# EAGLE board Seeeduino ADK 0.9b final (EAGLE 5.10)
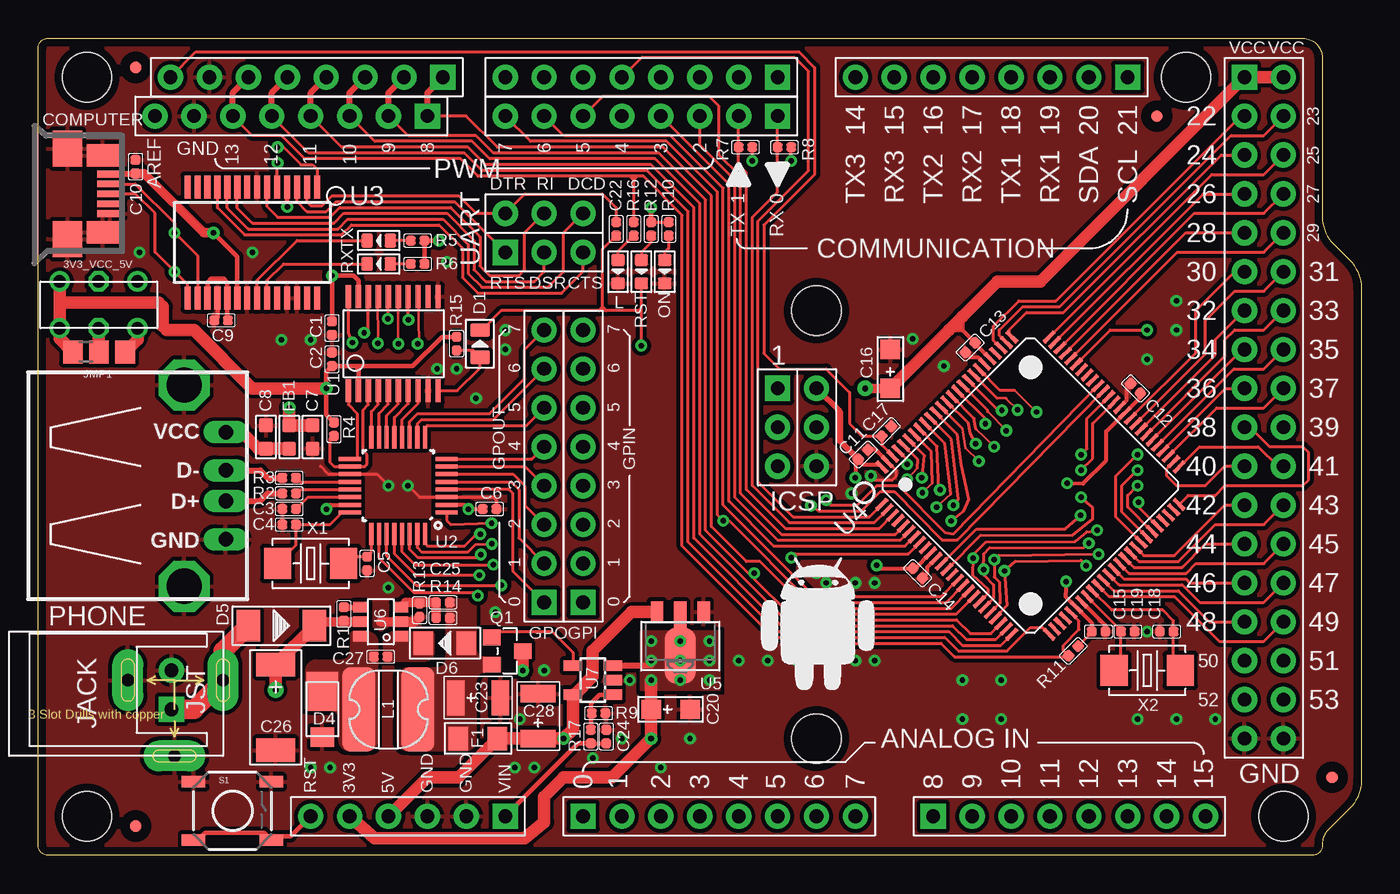
[diagram p0: board, top side]
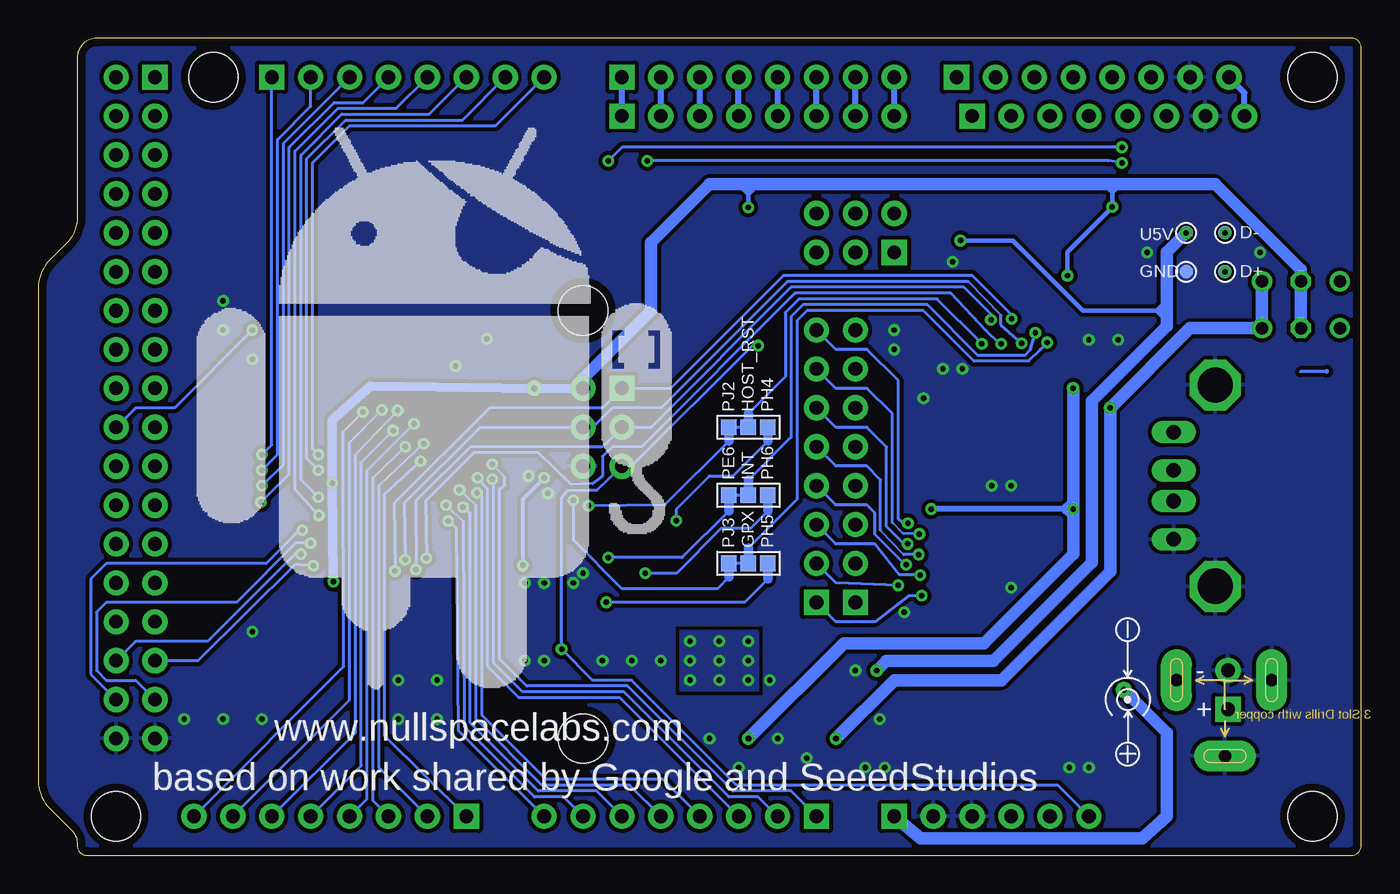
[diagram p1: board, bottom side, seen from below]

Size 86.36 x 53.34 mm. Coordinates in mm from the lower left corner, seen from the top.
Outline: 83.82,0.64 arc-90 83.19,0 0.64,0 arc-90 0,0.64 0,52.7 arc-90 0.64,53.34 82.55,53.34 arc-90 83.82,52.07 83.82,41.69 arc45 84.56,39.9 85.62,38.84 arc-45 86.36,37.05 86.36,4.86 arc-45 85.62,3.07 84.19,1.64 arc45 83.82,0.74 83.82,0.64
Copper layers (1*16): Top 0.0356mm / dielectric 1.5011mm / Bottom 0.0356mm
Design rules "SilverCircuits *": minimum track width 8mil, minimum drill 14mil, track to track 7mil, track to pad 7mil, pad to pad 7mil, via to via 7mil, smd to smd 0mil, copper to edge 20mil, drill to drill 8mil, minimum pad ring 10mil, minimum via ring 8mil, stop-mask expansion 4mil, vias tented up to drill 0mil, thermal gap 10mil
Net classes: 0 default: width 0.152 mm, drill 0.305 mm, clearance 0.152 mm
Holes 3.2 mm at 74.93,50.8 81.28,2.54 50.8,35.56 3.17,50.8 3.17,2.54 50.8,7.62

## Footprints (pad centres in the part's own frame; a part is rotated, then mirrored left to right if it is on the bottom)
2.54SW-2CH = drill 0.813 pad 1.27 round: CH1A -1.524,2.54; CH1B -1.524,-2.54; CH2A 1.524,2.54; CH2B 1.524,-2.54 | drill 0.813 pad 1.27 octagon: COM1 -1.524,0; COM2 1.524,0
0402 = smd 0.635 x 0.635: 1 -0.445,0; 2 0.445,0
0603 = smd 0.889 x 0.889: 1 -0.762,0; 2 0.762,0
AVX-A = smd 1.27 x 1.27: + -1.27,0; - 1.27,0
AVX-B = smd 1.143 x 2.286: + -1.46,0; - 1.46,0
AVX-C = smd 1.524 x 2.54: + -2.794,0; - 2.794,0
MOLEX-47364-0001 = smd 1.7 x 0.45: 1 2.8,1.3; 2 2.8,0.65; 3 2.8,0; 4 2.8,-0.65; 5 2.8,-1.3 | smd 1.9 x 2.375: GND1 0,2.95; GND4 0,-2.95 | smd 2.1 x 1.475: GND2 2.3,2.5; GND3 2.3,-2.5
D0805 = smd 0.889 x 1.27: + -0.889,0; - 0.889,0
DO-220AA = smd 1.27 x 1.524: + 1.811,0 | smd 2.54 x 2.032: - -1.176,0
D2010 = smd 1.524 x 2.032: + -2.159,0; - 2.159,0
D1206 = smd 1.27 x 1.524: + -1.397,0; - 1.397,0
TP_3535 = smd 0.889 x 0.889: T 0,0
1206 = smd 1.27 x 1.524: 1 -1.27,0; 2 1.27,0
CK_1X8 = drill 0.889 pad 1.651 square: 1 0,8.89 | drill 0.889 pad 1.651 round: 2 0,6.35; 3 0,3.81; 4 0,1.27; 5 0,-1.27; 6 0,-3.81; 7 0,-6.35; 8 0,-8.89
JUMPER = smd 1.016 x 1.016: 00 -1.27,0; 11 1.27,0; MM 0,0
CK_2X3 = drill 0.889 pad 1.651 square: 1 -1.27,2.54 | drill 0.889 pad 1.651 round: 2 -1.27,0; 3 -1.27,-2.54; 4 1.27,-2.54; 5 1.27,0; 6 1.27,2.54
2.54_6P = drill 0.889 pad 1.651 square: 1 0,6.35 | drill 0.889 pad 1.651 round: 2 0,3.81; 3 0,1.27; 4 0,-1.27; 5 0,-3.81; 6 0,-6.35
2.54-2X18P = drill 0.889 pad 1.651 square: 1 -1.27,21.59 | drill 0.889 pad 1.651 round: 2 -1.27,19.05; 3 -1.27,16.51; 4 -1.27,13.97; 5 -1.27,11.43; 6 -1.27,8.89; 7 -1.27,6.35; 8 -1.27,3.81; 9 -1.27,1.27; 10 -1.27,-1.27; 11 -1.27,-3.81; 12 -1.27,-6.35; 13 -1.27,-8.89; 14 -1.27,-11.43; 15 -1.27,-13.97; 16 -1.27,-16.51; 17 -1.27,-19.05; 18 -1.27,-21.59; 19 1.27,-21.59; 20 1.27,-19.05; 21 1.27,-16.51; 22 1.27,-13.97; 23 1.27,-11.43; 24 1.27,-8.89; 25 1.27,-6.35; 26 1.27,-3.81; 27 1.27,-1.27; 28 1.27,1.27; 29 1.27,3.81; 30 1.27,6.35; 31 1.27,8.89; 32 1.27,11.43; 33 1.27,13.97; 34 1.27,16.51; 35 1.27,19.05; 36 1.27,21.59
3.5MM_JACK = drill 0.813 pad 2.032 long: + 3.175,0; -1 -3.048,0; -2 0,-4.953
B0R-JMP = smd 1.5 x 1.3: 1 0,1.7; 2 0,0; 3 0,-1.7
PWR_JST = drill 0.889 pad 1.651 square: + 2.286,-1.27 | drill 0.889 pad 1.651 round: - 2.286,1.27
D0603 = smd 0.762 x 0.889: + -0.762,0; - 0.762,0
2281 = smd 2.15 x 5.5: P$1 -1.925,0; P$2 1.925,0
MARK_30 = smd 0.762 x 0.762: MARK 0,0
PN87520 = drill 0.95 long: 1 -3.5,2.71; 2 -1,2.71; 3 1,2.71; 4 3.5,2.71 | drill 2.3 octagon: SG1 -6.57,0; SG2 6.57,0
SOT23_ = smd 1.016 x 1.143: 1 -0.889,-1.016; 2 0.889,-1.016; 3 0,1.016
TACTILE_SWITCH_SMD = smd 1.524 x 0.762: 1 -2.54,1.905; 2 2.54,1.905; 3 -2.54,-1.905; 4 2.54,-1.905
TSSOP20 = smd 0.35 x 1.5: 1 -3.25,-3.065; 2 -2.6,-3.065; 3 -1.95,-3.065; 4 -1.3,-3.065; 5 -0.65,-3.065; 6 0,-3.065; 7 0.65,-3.065; 8 1.3,-3.065; 9 1.95,-3.065; 10 2.6,-3.065; 11 2.6,3.065; 12 1.95,3.065; 13 1.3,3.065; 14 0.65,3.065; 15 0,3.065; 16 -0.65,3.065; 17 -1.3,3.065; 18 -1.95,3.065; 19 -2.6,3.065; 20 -3.25,3.065
TQFP32-05 = smd 0.27 x 1.45: 1 -1.75,-3.16; 2 -1.25,-3.16; 3 -0.75,-3.16; 4 -0.25,-3.16; 5 0.25,-3.16; 6 0.75,-3.16; 7 1.25,-3.16; 8 1.75,-3.16; 17 1.75,3.16; 18 1.25,3.16; 19 0.75,3.16; 20 0.25,3.16; 21 -0.25,3.16; 22 -0.75,3.16; 23 -1.25,3.16; 24 -1.75,3.16 | smd 1.45 x 0.27: 9 3.16,-1.75; 10 3.16,-1.25; 11 3.16,-0.75; 12 3.16,-0.25; 13 3.16,0.25; 14 3.16,0.75; 15 3.16,1.25; 16 3.16,1.75; 25 -3.16,1.75; 26 -3.16,1.25; 27 -3.16,0.75; 28 -3.16,0.25; 29 -3.16,-0.25; 30 -3.16,-0.75; 31 -3.16,-1.25; 32 -3.16,-1.75
SSOP28 = smd 0.4 x 1.5: 1 -4.225,-3.625; 2 -3.575,-3.625; 3 -2.925,-3.625; 4 -2.275,-3.625; 5 -1.625,-3.625; 6 -0.975,-3.625; 7 -0.325,-3.625; 8 0.325,-3.625; 9 0.975,-3.625; 10 1.625,-3.625; 11 2.275,-3.625; 12 2.925,-3.625; 13 3.575,-3.625; 14 4.225,-3.625; 15 4.225,3.625; 16 3.575,3.625; 17 2.925,3.625; 18 2.275,3.625; 19 1.625,3.625; 20 0.975,3.625; 21 0.325,3.625; 22 -0.325,3.625; 23 -0.975,3.625; 24 -1.625,3.625; 25 -2.275,3.625; 26 -2.925,3.625; 27 -3.575,3.625; 28 -4.225,3.625
TQFP100 = smd 1 x 0.3: 1 -7.725,6; 2 -7.725,5.5; 3 -7.725,5; 4 -7.725,4.5; 5 -7.725,4; 6 -7.725,3.5; 7 -7.725,3; 8 -7.725,2.5; 9 -7.725,2; 10 -7.725,1.5; 11 -7.725,1; 12 -7.725,0.5; 13 -7.725,0; 14 -7.725,-0.5; 15 -7.725,-1; 16 -7.725,-1.5; 17 -7.725,-2; 18 -7.725,-2.5; 19 -7.725,-3; 20 -7.725,-3.5; 21 -7.725,-4; 22 -7.725,-4.5; 23 -7.725,-5; 24 -7.725,-5.5; 25 -7.725,-6; 51 7.725,-6; 52 7.725,-5.5; 53 7.725,-5; 54 7.725,-4.5; 55 7.725,-4; 56 7.725,-3.5; 57 7.725,-3; 58 7.725,-2.5; 59 7.725,-2; 60 7.725,-1.5; 61 7.725,-1; 62 7.725,-0.5; 63 7.725,0; 64 7.725,0.5; 65 7.725,1; 66 7.725,1.5; 67 7.725,2; 68 7.725,2.5; 69 7.725,3; 70 7.725,3.5; 71 7.725,4; 72 7.725,4.5; 73 7.725,5; 74 7.725,5.5; 75 7.725,6 | smd 0.3 x 1: 26 -6,-7.725; 27 -5.5,-7.725; 28 -5,-7.725; 29 -4.5,-7.725; 30 -4,-7.725; 31 -3.5,-7.725; 32 -3,-7.725; 33 -2.5,-7.725; 34 -2,-7.725; 35 -1.5,-7.725; 36 -1,-7.725; 37 -0.5,-7.725; 38 0,-7.725; 39 0.5,-7.725; 40 1,-7.725; 41 1.5,-7.725; 42 2,-7.725; 43 2.5,-7.725; 44 3,-7.725; 45 3.5,-7.725; 46 4,-7.725; 47 4.5,-7.725; 48 5,-7.725; 49 5.5,-7.725; 50 6,-7.725; 76 6,7.725; 77 5.5,7.725; 78 5,7.725; 79 4.5,7.725; 80 4,7.725; 81 3.5,7.725; 82 3,7.725; 83 2.5,7.725; 84 2,7.725; 85 1.5,7.725; 86 1,7.725; 87 0.5,7.725; 88 0,7.725; 89 -0.5,7.725; 90 -1,7.725; 91 -1.5,7.725; 92 -2,7.725; 93 -2.5,7.725; 94 -3,7.725; 95 -3.5,7.725; 96 -4,7.725; 97 -4.5,7.725; 98 -5,7.725; 99 -5.5,7.725; 100 -6,7.725
SOT89 = smd 0.8 x 1.4: 1 -1.524,-1.905; 3 1.524,-1.905 | smd 0.8 x 1.9: 2 0,-1.651 | smd 2.032 x 3.65: 4 0,0.94
TSOT6 = smd 0.69 x 1: 1 -0.95,-1.3; 2 0,-1.3; 3 0.95,-1.3; 4 0.95,1.3; 5 0,1.3; 6 -0.95,1.3
SOT23-5 = smd 0.69 x 1.2: 1 -0.95,-1.3; 2 0,-1.3; 3 0.95,-1.3; 4 0.95,1.3; 5 -0.95,1.3
5032 = smd 1.778 x 2.032: 1 -2.159,0; 2 2.159,0

## Placement (x,y rotation side)
3V3_VCC_5V  SWITCH-2CH-6P-2.54  [2.54SW-2CH]  3.94,35.94 90 top
C1  100nF  [0402]  19.18,34.42 270 top
C2  100nF  [0402]  19.18,32.38 90 top
C3  100nF  [0402]  16.38,22.61 180 top
C4  13pF  [0402]  16.38,21.59 180 top
C5  13pF  [0402]  21.46,19.05 270 top
C6  100nF  [0402]  29.46,22.61 0 top
C7  10v_1uF  [0603]  17.91,27.3 270 top
C8  10v_1uF  [0603]  14.86,27.3 90 top
C9  100nF  [0402]  11.94,34.92 0 top
C10  10nF  [0402]  6.35,44.96 270 top
C11  100nF  [0402]  53.85,26.16 225 top
C12  100nF  [0402]  71.63,30.48 315 top
C13  100nF  [0402]  60.83,33.15 45 top
C14  100nF  [0402]  57.4,18.41 135 top
C15  100nF  [0402]  69.22,14.61 180 top
C16  10v_10uF  [AVX-A]  55.63,31.75 90 top
C17  100nF  [0402]  55.37,27.69 225 top
C18  13pF  [0402]  73.66,14.61 0 top
C19  13pF  [0402]  71.12,14.61 180 top
C20  22uF_6.3v  [AVX-A]  41.27,9.53 0 top
C22  100nF  [0402]  37.72,40.89 90 top
C23  10v_47uF  [AVX-B]  28.7,10.29 0 top
C24  100nF  [0402]  37.08,7.75 270 top
C25  1nF  [0402]  26.42,16.51 0 top
C26  25v_47uF  [AVX-C]  15.49,9.65 270 top
C27  10nF  [0402]  22.35,12.95 180 top
C28  10v_47uF  [AVX-B]  32.64,9.08 90 top
COMPUTER  Micro USB ( MOLEX-47364-0001 )  [MOLEX-47364-0001]  1.91,43.18 0 top
D1  1N4448WS  [D0805]  28.83,33.4 90 top
D4  SS1P3L  [DO-220AA]  18.54,9.53 270 top
D5  1N4007  [D2010]  15.88,14.99 0 top
D6  LL4148  [D1206]  26.54,13.84 180 top
D+  DNP  [TP_3535]  8.89,38.1 0 bottom
D-  DNP  [TP_3535]  8.89,40.64 0 bottom
F1  500mA  [1206]  28.7,7.62 0 top
FB1  Ferrite Bead 120R 500mA  [0603]  16.38,27.3 90 top
GND  DNP  [TP_3535]  11.43,38.1 0 bottom
GPI  DNP  [CK_1X8]  35.56,25.4 180 top
GPO  DNP  [CK_1X8]  33.02,25.4 180 top
GPX  DNP  [JUMPER]  40.01,19.05 180 bottom
HOST_RST  DNP  [JUMPER]  40.01,27.94 180 bottom
ICSP  2.54 male 2*3p  [CK_2X3]  49.53,27.94 0 top
INT  DNP  [JUMPER]  40.01,23.5 180 bottom
INTERFACE  2.54 female 8p  [CK_1X8]  62.23,50.8 270 top
J1  2.54 female 6p  [2.54_6P]  24.13,2.54 270 top
J2  2.54 Female 2*18p  [2.54-2X18P]  80.01,29.21 0 top
J3  2.54 female 8p  [CK_1X8]  17.53,50.8 270 top
J3E  DNP  [CK_1X8]  16.51,48.26 270 top
J4  2.54 female 8p  [CK_1X8]  39.37,50.8 270 top
J4E  DNP  [CK_1X8]  39.37,48.26 270 top
J5  2.54 female 8p  [CK_1X8]  44.45,2.54 90 top
J6  2.54 female 8p  [CK_1X8]  67.31,2.54 90 top
JACK  DNP  [3.5MM_JACK]  8.89,11.43 0 top
JMP1  0R-JUMPB  [B0R-JMP]  3.96,32.87 270 top
JST  JST  [PWR_JST]  6.41,10.79 0 top
L  GREEN  [D0603]  37.85,38.1 270 top
L1  IDCP-2218-10uH  [2281]  22.86,9.53 0 top
MARK1  DNP  [MARK_30]  84.45,5.08 0 top
MARK2  DNP  [MARK_30]  73.03,48.26 0 top
MARK3  DNP  [MARK_30]  6.35,1.91 0 top
MARK4  DNP  [MARK_30]  6.35,51.44 0 top
ON  GREEN  [D0603]  40.89,38.1 270 top
PHONE  USB-A Port  [PN87520]  9.53,24.13 270 top
Q1  si2305DS  [SOT23_]  30.61,13.34 270 top
R1  100k  [0402]  19.94,15.75 90 top
R2  33R  [0402]  16.38,23.62 0 top
R3  33R  [0402]  16.38,24.64 0 top
R4  4K7  [0402]  19.3,27.81 90 top
R5  1K  [0402]  24.77,40.13 0 top
R6  1K  [0402]  24.77,38.61 0 top
R7  1k  [0402]  46.16,46.23 180 top
R8  1k  [0402]  48.7,46.23 180 top
R9  100k  [0402]  36.58,9.27 180 top
R10  1K  [0402]  41.15,40.89 90 top
R11  10k  [0402]  67.56,13.34 45 top
R12  1K  [0402]  40.01,40.89 90 top
R13  8.2k_1%  [0402]  24.89,16 90 top
R14  43k_1%  [0402]  26.42,15.49 0 top
R15  10k  [0402]  27.3,33.4 270 top
R16  1K  [0402]  38.86,40.89 90 top
R17  100k  [0402]  36.07,7.75 90 top
RST  RED  [D0603]  39.37,38.1 270 top
RX  RED  [D0603]  22.23,38.61 180 top
S1  [TACTILE_SWITCH_SMD]  12.67,2.9 0 top
TX  RED  [D0603]  22.23,40.13 180 top
U1  TXB0108PW  [TSSOP20]  23.5,33.4 0 top
U2  MAX3421EEHJ+  [TQFP32-05]  23.5,24.13 90 top
U3  FT232RL  [SSOP28]  13.97,40.01 180 top
U4  ATMEGA2560-16AU  [TQFP100]  64.77,24.13 45 top
U5  LD1117-3.3  [SOT89]  41.91,13.97 180 top
U5V  DNP  [TP_3535]  11.43,40.64 0 bottom
U6  LM2734YMK  [TSOT6]  22.35,15.24 90 top
U7  LM321MF  [SOT23-5]  36.2,11.43 90 top
U$1  [NINJA_SM]  46.25,10.44 0 top
U$2  [PIRATE]  76.23,9.8 0 bottom
UART  DNP  [CK_2X3]  33.02,40.64 90 top
X1  12.000MHz  [5032]  17.78,19.05 180 top
X2  16.000MHz  [5032]  72.39,12.06 0 top

## Library data of the parts
3V3_VCC_5V C1-C20 C22-C28 D1 D4-D6 F1 FB1 GPX HOST_RST INT L L1 MARK1-MARK4 ON Q1 R1-R17 RST RX TX X1 X2 = Discrete
COMPUTER = usb_con-update
D+ D- GND U5V = For_Test_Albert
GPI GPO ICSP INTERFACE J1-J3 J3E J4 J4E J5 J6 JACK JST UART = Connector
JMP1 = jump-0r-smd
PHONE = con-berg
S1 = SparkFun
U1 U5-U7 = IC
U2 = bibaja
U3 U4 = ICs_v54
U$1 U$2 = NSL_LOGO

## Nets
3V3: 3V3_VCC_5V.CH1A 3V3_VCC_5V.CH2A C2.1 C6.1 C20.+ J1.5 JMP1.3 R4.2 R15.1 U1.2 U2.2 U2.23 U5.2 U5.4 U7.3
5V: 3V3_VCC_5V.CH1B 3V3_VCC_5V.CH2B C7.1 C28.+ F1.2 FB1.2 J1.4 JMP1.1 U5.3 U7.5
ADC8: J6.1 U4.89
ADC9: J6.2 U4.88
ADC10: J6.3 U4.87
ADC11: J6.4 U4.86
ADC12: J6.5 U4.85
ADC13: J6.6 U4.84
ADC14: J6.7 U4.83
ADC15: J6.8 U4.82
AREF: C17.2 J3.8 J3E.8 U4.98
CTS: U3.11 UART.3
D+: COMPUTER.3 D+.T U3.15
D-: COMPUTER.2 D-.T U3.16
DCD: U3.10 UART.4
DSR: U3.9 UART.2
DTR: C22.2 U3.2 UART.6
FT_RX: R7.1 U3.5
FT_TX: R8.1 U3.1
GATE: Q1.1 U7.4
GND: C1.2 C2.2 C3.2 C4.2 C5.2 C6.2 C7.2 C8.2 C9.1 C10.1 C11.1 C12.1 C13.1 C14.1 C15.1 C16.- C17.1 C18.1 C19.1 C20.- C23.- C24.1 C26.- C28.- COMPUTER.5 COMPUTER.GND1 COMPUTER.GND2 COMPUTER.GND3 COMPUTER.GND4 D4.+ GND.T ICSP.4 J1.2 J1.3 J2.18 J2.19 J3.7 J3E.7 JACK.-1 JACK.-2 JST.- L.- ON.- PHONE.4 PHONE.SG1 PHONE.SG2 R9.1 R13.1 S1.1 S1.2 U1.9 U1.11 U2.3 U2.19 U3.7 U3.18 U3.21 U3.25 U3.26 U4.11 U4.32 U4.62 U4.81 U4.99 U5.1 U6.2 U7.2
GPX_3V3: U1.1 U2.17
IN_5V: C23.+ C25.2 D6.+ F1.1 L1.P$2 Q1.2 R14.2
INT_3V3: R4.1 U1.3 U2.18
LED_RX: RX.- U3.23
LED_TX: TX.- U3.22
MISO_3V3: U1.5 U2.15
MOSI_3V3: U1.4 U2.16
N$1: C9.2 U3.17 U3.19
N$2: C18.2 U4.34 X2.2
N$3: C19.2 U4.33 X2.1
N$5: D5.+ JACK.+ JST.+
N$6: R1.2 U6.4
N$7: C27.1 D6.- U6.1
N$8: C27.2 D4.- L1.P$1 U6.6
N$9: R9.2 R17.2 U7.1
N$10: PHONE.2 R3.1
N$11: PHONE.3 R2.1
N$12: R3.2 U2.20
N$13: R2.2 U2.21
N$14: C8.1 FB1.1 PHONE.1
N$15: C4.1 U2.24 X1.2
N$16: C5.1 U2.25 X1.1
N$17: C25.1 R13.2 R14.1 U6.3
N$18: GPI.2 U2.27
N$19: GPI.3 U2.28
N$20: GPI.4 U2.29
N$21: GPI.5 U2.30
N$22: GPI.6 U2.31
N$23: GPI.7 U2.32
N$24: GPI.8 U2.1
N$25: GPI.1 U2.26
N$26: GPO.2 U2.5
N$27: GPO.3 U2.6
N$28: GPO.4 U2.7
N$29: GPO.5 U2.8
N$30: GPO.6 U2.9
N$31: GPO.7 U2.10
N$32: GPO.8 U2.11
N$33: GPO.1 U2.4
N$34: R5.1 TX.+
N$35: R6.1 RX.+
N$36: L.+ R16.1
N$37: ON.+ R10.1
N$38: R12.1 RST.+
N$39: C3.1 U2.22
PA0/D22: J2.2 U4.78
PA1/D23: J2.35 U4.77
PA2/D24: J2.3 U4.76
PA3/D25: J2.34 U4.75
PA4/D26: J2.4 U4.74
PA5/D27: J2.33 U4.73
PA6/D28: J2.5 U4.72
PA7/D29: J2.32 U4.71
PB0/SS/D53: J2.20 U1.15 U4.19
PB1/SCK/D52: ICSP.2 J2.17 U1.14 U4.20
PB2/MOSI/D51: ICSP.5 J2.21 U1.17 U4.21
PB3/MISO/D50: ICSP.1 J2.16 U1.16 U4.22
PB4/D10: J3.3 J3E.3 U4.23
PB5/D11: J3.4 J3E.4 U4.24
PB6/D12: J3.5 J3E.5 U4.25
PB7/D13: J3.6 J3E.6 R16.2 U4.26
PC0/D37: J2.28 U4.53
PC1/D36: J2.9 U4.54
PC2/D35: J2.29 U4.55
PC3/D34: J2.8 U4.56
PC4/D33: J2.30 U4.57
PC5/D32: J2.7 U4.58
PC6/D31: J2.31 U4.59
PC7/D30: J2.6 U4.60
PD0/SCL: INTERFACE.1 U4.43
PD1/SDA: INTERFACE.2 U4.44
PD2/RX1: INTERFACE.3 U4.45
PD3/TX1: INTERFACE.4 U4.46
PD4: U4.47
PD5: U4.48
PD6: U4.49
PD7/D38: J2.10 U4.50
PE0/RX0/D0: J4.1 J4E.1 R8.2 U4.2
PE1/TX0/D1: J4.2 J4E.2 R7.2 U4.3
PE2: U4.4
PE3/D5: J4.6 J4E.6 U4.5
PE4/D2: J4.3 J4E.3 U4.6
PE5/D3: J4.4 J4E.4 U4.7
PE6: INT.11 INT.MM U1.18 U4.8
PE7: U4.9
PF0/D54: J5.1 U4.97
PF1/D55: J5.2 U4.96
PF2/D56: J5.3 U4.95
PF3/D57: J5.4 U4.94
PF4/D58: J5.5 U4.93
PF5/D59: J5.6 U4.92
PF6/D60: J5.7 U4.91
PF7/D61: J5.8 U4.90
PG0/D41: J2.26 U4.51
PG1/D40: J2.11 U4.52
PG2/D39: J2.27 U4.70
PG3: U4.28
PG4: U4.29
PG5/D4: J4.5 J4E.5 U4.1
PH0/RXD2: INTERFACE.5 U4.12
PH1/TXD2: INTERFACE.6 U4.13
PH2: U4.14
PH3/D6: J4.7 J4E.7 U4.15
PH4/D7: HOST_RST.00 J4.8 J4E.8 U4.16
PH5/D8: GPX.00 J3.1 J3E.1 U4.17
PH6/D9: INT.00 J3.2 J3E.2 U4.18
PH7: U4.27
PJ0/RXD3: INTERFACE.7 U4.63
PJ1/TXD3: INTERFACE.8 U4.64
PJ2: HOST_RST.11 HOST_RST.MM U1.13 U4.65
PJ3: GPX.11 GPX.MM U1.20 U4.66
PJ4: U4.67
PJ5: U4.68
PJ6: U4.69
PJ7: U4.79
PL0/D49: J2.22 U4.35
PL1/D48: J2.15 U4.36
PL2/D47: J2.23 U4.37
PL3/D46: J2.14 U4.38
PL4/D45: J2.24 U4.39
PL5/D44: J2.13 U4.40
PL6/D43: J2.25 U4.41
PL7/D42: J2.12 U4.42
RESET: C22.1 D1.- ICSP.3 J1.6 R11.1 RST.- S1.3 S1.4 U4.30
RI: U3.6 UART.5
RST_3V3: U1.8 U2.12
RTS: U3.3 UART.1
SCK_3V3: U1.7 U2.13
SPI_OE: D1.+ R15.2 U1.10
SS_3V3: U1.6 U2.14
USB_5V: C10.2 COMPUTER.1 Q1.3 R5.2 R6.2 U3.20 U5V.T
VCC: 3V3_VCC_5V.COM1 3V3_VCC_5V.COM2 C1.1 C11.2 C12.2 C13.2 C14.2 C15.2 C16.+ ICSP.6 J2.1 J2.36 JMP1.2 R10.2 R11.2 R12.2 U1.19 U3.4 U4.10 U4.31 U4.61 U4.80 U4.100
VIN: C24.2 C26.+ D5.- J1.1 R1.1 R17.1 U6.5

## Tracks (layer width: path | path; a pad name or v marks a point on that pad's centre or on a via)
3V3  (via drill 0.36 pad 0.64, 0.36 pad 0.81, 0.38 pad 0.81)
  Top 0.254: U2.23 19.07,22.88 v18.8,22.61 | U2.2 27.79,22.88 v28.07,22.61 C6.1
  Top 0.305: 20.89,31.75 U1.2 | 21.08,31.94 20.89,31.75 | 20.89,31.75 20.7,31.94 | 20.7,31.94 C2.1 18.8,31.56 v18.8,30.48 18.8,28.77 R4.2 | 20.7,31.94 21.08,31.94 | 21.08,31.94 24.45,31.94 26.35,33.85 R15.1
  Top 0.406: U7.3 40.01,12.38 v40.01,12.7
  Top 0.61: v41.91,13.97 U5.2
  Top 0.813: J1.5 21.97,1.12 31.75,1.12 33.02,2.16 33.02,3.81 34.29,5.08 37.47,5.08 v40.01,7.62 C20.+ v40.01,11.43 | v18.8,30.48 13.97,30.48 10.16,34.29 8.38,34.29 8.13,34.54 8.13,35.81 7.87,36.07 1.52,36.07 | 1.52,36.07 1.4,36.2 3V3_VCC_5V.CH2A | 1.52,36.07 1.4,35.94 3V3_VCC_5V.CH1A 1.4,33.73 JMP1.3
  Bottom 0.406: 19.18,22.61 v28.07,22.61
  Bottom 0.813: 18.8,22.23 18.8,19.68 24.64,13.84 33.78,13.84 v40.01,7.62 | 18.8,22.23 v18.8,22.61 18.8,22.99 | 18.8,22.99 v18.8,30.48 | 18.8,22.99 19.18,22.61 18.8,22.23
  other vias: 41.91,11.43 41.91,12.7 43.81,13.97 43.81,12.7 43.81,11.43 40.01,13.97
  pour Top (isolate 0.254, rank 2, no thermals): 44.45,14.61 44.45,10.79 39.37,10.79 39.37,14.61
  pour Bottom (isolate 0.254, rank 2, no thermals): 44.45,14.61 44.45,10.79 39.37,10.79 39.37,14.61
5V  (via drill 0.36 pad 0.81, 0.38 pad 0.81)
  Top 0.813: J1.4 25.4,5.08 27.43,5.08 F1.2 C28.+ v34.29,7.62 34.9,8.22 U7.5 34.99,10.48 36.2,11.68 36.2,13.34 38.73,15.88 U5.3 | v16.38,29.21 FB1.2 C7.1 | 3V3_VCC_5V.CH1B 6.48,33.68 JMP1.1
  Bottom 0.813: 3V3_VCC_5V.CH2B 3V3_VCC_5V.CH1B 11.18,34.42 v16.38,29.21 16.38,18.54 23.5,11.43 30.48,11.43 v34.29,7.62
ADC8  (via drill 0.36 pad 0.64)
  Top 0.178: 60.33,27.87 60.53,26.59 v61.4,25.73
  Top 0.203: 60.33,27.87 U4.89
  Bottom 0.203: J6.1 63.74,7.8 63.74,23.6 v61.4,25.73
ADC9  (via drill 0.36 pad 0.41)
  Top 0.203: U4.88 60.71,28.21 60.84,27.54 v61.2,26.87
  Bottom 0.178: 64.12,24.14 v61.2,26.87
  Bottom 0.203: J6.2 64.12,5.72 64.12,24.14
ADC10  (via drill 0.36 pad 0.64)
  Top 0.178: v62.4,26.67 61.22,27.82
  Top 0.203: U4.87 61.09,28.52 61.22,27.82
  Bottom 0.178: 64.51,24.64 v62.4,26.67
  Bottom 0.203: J6.3 64.52,3.56 64.51,24.64
ADC11  (via drill 0.36 pad 0.64)
  Top 0.203: U4.86 61.85,28.46 v61.83,28.17
  Bottom 0.178: 64.89,25.12 v61.83,28.17
  Bottom 0.203: J6.4 64.9,3.68 64.89,25.12
ADC12  (via drill 0.36 pad 0.64)
  Top 0.178: v63.19,27.73 61.98,28.96
  Top 0.203: U4.85 61.98,29.05 61.98,28.96
  Bottom 0.178: 65.28,25.65 v63.19,27.73
  Bottom 0.203: J6.5 65.28,5.84 65.28,25.65
ADC13  (via drill 0.36 pad 0.64)
  Top 0.203: U4.84 62.65,29.08 v62.9,29.04
  Bottom 0.178: 65.66,26.16 v62.9,29.04
  Bottom 0.203: J6.6 65.66,8 65.66,26.16
ADC14  (via drill 0.36 pad 0.64)
  Top 0.178: v63.94,29.07 63.17,29.83
  Top 0.203: U4.83 62.59,29.84 63.17,29.83
  Bottom 0.178: 66.05,26.96 v63.94,29.07
  Bottom 0.203: J6.7 66.04,10.16 66.05,26.96
ADC15  (via drill 0.36)
  Top 0.178: v65.17,28.94 63.74,30.35
  Top 0.203: U4.82 62.79,30.35 63.74,30.35
  Bottom 0.178: 66.46,27.64 v65.17,28.94
  Bottom 0.203: J6.8 66.42,12.32 66.46,27.64
AREF
  Top 0.203: U4.98 55.06,26.77 C17.2 53.78,27.37 52.96,28.19 52.96,30.23 51.44,31.75 48.39,31.75 47.37,32.77 47.37,41.15 50.67,44.45 50.67,51.44 49.66,52.45 10.29,52.45 J3.8
  Bottom 0.406: J3E.8 7.62,49.78 J3.8
CTS
  Top 0.203: U3.11 11.7,42.28 13.46,40.51 19.81,40.51 20.45,41.15 26.16,41.15 27.69,39.62 27.69,37.72 28.7,36.7 34.16,36.7 35.56,38.1 UART.3
D+  (via drill 0.36 pad 0.64)
  Top 0.203: U3.15 9.74,37.24 D+.T 7.62,39.37 7.62,41.91 6.35,43.18 COMPUTER.3
  other vias: 8.89,38.1
D-  (via drill 0.36 pad 0.64)
  Top 0.203: U3.16 10.39,39.13 D-.T 8.89,41.27 6.33,43.83 COMPUTER.2
  other vias: 8.89,40.64
DCD
  Top 0.203: U3.10 12.35,42.27 13.72,40.89 19.56,40.89 20.19,41.53 26.42,41.53 28.07,39.88 28.07,37.97 28.96,37.08 33.27,37.08 34.29,38.1 34.29,40.64 UART.4
DSR
  Top 0.203: U3.9 12.99,42.25 13.97,41.27 19.3,41.27 19.94,41.91 26.67,41.91 28.45,40.13 28.45,38.23 29.21,37.47 32.38,37.47 33.02,38.1 UART.2
DTR
  Top 0.203: U3.2 17.55,42.65 17.78,42.42 18.54,42.42 19.18,43.05 27.43,43.05 28.57,41.91 UART.6 31.75,43.18 36.83,43.18 37.72,42.29 C22.2
FT_RX  (via drill 0.36 pad 0.64)
  Top 0.203: U3.5 15.6,44.8 v15.62,45.21 | v46.61,45.34 R7.1
  Bottom 0.203: v15.62,45.21 16.51,45.34 v46.61,45.34
FT_TX  (via drill 0.36 pad 0.64)
  Top 0.203: U3.1 18.2,44.8 17.91,45.09 17.14,45.09 16,46.23 v15.62,46.23 | v49.15,45.34 R8.1
  Bottom 0.203: v15.62,46.23 48.26,46.23 v49.15,45.34
GATE
  Top 0.203: Q1.1 29.59,14.35 29.84,14.61 33.53,14.61 34.9,13.24 U7.4
GND  (via drill 0.36 pad 0.64)
  Top 0.203: U4.99 56.01,25.11 56.01,24.77 55.75,24.51 54.23,24.51 | v54.36,24.77 54.48,24.64 | v22.86,24.13 22.11,24.88 U2.19 18.93,24.88 18.41,25.4 | v24.13,24.13 24.88,23.38 U2.3 29.71,23.38 29.91,23.18 C6.2
  Top 0.254: U4.11 58.04,18.81 58.04,18.41 C14.1 | U4.32 69.66,15 C15.1 | U4.62 71.06,29.71 71.06,30.54 C12.1 | U4.81 61.34,32.51 60.83,32.51 C13.1 | U4.99 54.65,26.48 C11.1
  Top 0.305: U3.18 11.7,35.13 C9.1
  Top 0.61: R13.1 24.57,15.24 22.35,15.24
  other vias: 29.84,15.88 53.09,23.62 53.34,17.78 54.61,17.78 51.44,17.78 50.8,18.41 47.62,12.7 45.72,12.7 53.34,12.7 54.61,12.7 42.55,7.62 40.64,5.71 38.61,11.43 38.1,7.62 36.2,6.35 32.38,5.71 31.11,5.71 27.3,31.75 26.04,31.75 28.57,29.84 26.67,38.73 17.78,33.66 15.88,33.66 30.48,34.29 30.48,33.02 72.39,14.61 60.33,8.89 62.87,11.43 60.33,11.43 62.87,8.89 71.75,8.89 74.3,8.89 76.83,8.89 72.39,32.38 74.3,34.29 74.3,36.2 57.09,33.72 59.12,31.94 13.97,39.37 6.6,39.37 22.86,17.46 49.53,12.7 19.05,5.71 17.78,5.71 33.02,12.06 31.43,8.89
  pour Bottom (isolate 0.254, rank 6): 0,53.34 86.36,53.34 86.36,0 0,0
  pour Top (isolate 0.254, rank 6): 0,53.34 86.36,53.34 86.36,0 0,0
GPX_3V3
  Top 0.203: U2.17 20.8,25.88 20.83,25.91 20.83,28.83 20.25,29.41 U1.1
IN_5V
  pour Top (isolate 0.254, rank 2, no thermals): 28.51,7.49 arc-90 27.88,6.86 24.13,6.86 arc-90 23.5,7.49 23.5,11.56 arc-90 24.13,12.19 26.04,12.19 arc90 26.67,12.83 26.67,16.83 arc-90 26.8,16.95 27.88,16.95 arc-90 28.51,16.32 28.51,13.53 arc90 29.15,12.89 30.1,12.89 30.1,12 29.15,12 arc90 28.51,11.37
INT_3V3
  Top 0.203: U1.3 21.55,29.42 21.21,29.08 21.21,26.42 21.46,26.16 21.46,25.53 21.32,25.38 U2.18 19.32,25.38 19.05,25.65 19.05,27.18 19.24,27.37 R4.1
LED_RX
  Top 0.203: RX.- 16,38.61 14.95,37.55 U3.23
LED_TX
  Top 0.203: TX.- 16.89,40.13 14.29,37.54 U3.22
MISO_3V3
  Top 0.203: U1.5 22.84,29.45 22.25,28.85 U2.15
MOSI_3V3
  Top 0.203: U2.16 21.75,28.98 22.2,29.43 U1.4
N$1
  Top 0.305: U3.17 11.04,37.4 11.3,37.66 12.09,37.66 12.35,37.4 U3.19 12.35,34.96 C9.2
N$2
  Top 0.203: X2.2 74.11,12.51 C18.2 74.11,15.3 73.41,16 70.07,16 U4.34
N$3
  Top 0.203: X2.1 70.67,12.51 C19.2 70.67,14.69 U4.33
N$4
  Bottom 0.203: 2.23,31.57 3.96,31.57
  Bottom 0.305: 2.23,31.6 2.23,31.57
N$5
  Top 1.27: D5.+ 12.06,13.34 JACK.+ 10.16,9.53 JST.+
N$6
  Top 0.406: R1.2 U6.4
N$7
  pour Top (isolate 0.254, no thermals): 25.78,13.34 arc-90 25.15,12.7 22.73,12.7 arc-90 22.61,12.83 22.61,13.91 arc-90 23.24,14.54 25.65,14.54 arc-90 25.78,14.41
N$8
  pour Top (isolate 0.254, rank 2, no thermals): 21.46,14.54 arc-90 22.1,13.91 22.1,7.49 arc-90 21.46,6.86 20.32,6.86 arc-90 19.68,7.49 19.68,8.89 arc90 19.05,9.53 17.53,9.53 17.53,12.06 arc-90 18.16,12.7 19.81,12.7 arc90 20.45,13.34 20.45,14.41 arc-90 20.57,14.54
N$9
  Top 0.305: 36.07,9.21 R17.2 | R9.2 36.07,9.21 | 36.07,9.21 36.07,9.91 36.64,10.48 U7.1
N$10
  Top 0.406: PHONE.2 14.49,25.13 14.99,24.64 R3.1
N$11
  Top 0.406: PHONE.3 14.49,23.13 14.99,23.62 R2.1
N$12
  Top 0.203: U2.20 17.09,24.38 R3.2
N$13
  Top 0.203: U2.21 17.09,23.88 R2.2
N$14
  Top 0.813: FB1.1 C8.1 14.35,26.54 13.26,27.63 PHONE.1
N$15
  Top 0.203: U2.24 19.84,22.38 19.05,21.59 C4.1 16.83,20.26 X1.2
N$16
  Top 0.203: U2.25 21.75,19.78 C5.1 20.38,19.49 X1.1
N$17
  Top 0.61: R14.1 C25.1 24.77,16.51 | 24.77,16.51 23.97,16.51 U6.3 | R13.2 24.83,16.45 24.77,16.51
N$18  (via drill 0.36 pad 0.64)
  Top 0.203: U2.27 22.75,19.55 24.67,17.62 v30.22,17.62
  Bottom 0.203: GPI.2 34.29,17.78 v30.22,17.62
N$19  (via drill 0.36 pad 0.64)
  Top 0.203: U2.28 23.25,19.68 24.63,18.29 v28.8,18.29
  Bottom 0.178: 30.14,18.3 31.75,20.32
  Bottom 0.203: 31.75,20.32 34.29,20.32 GPI.3 | v28.8,18.29 30.14,18.3
N$20  (via drill 0.36 pad 0.64)
  Top 0.203: U2.29 23.75,19.82 24.6,18.96 v29.71,18.96
  Bottom 0.203: GPI.4 34.29,22.86 32.26,22.86 31.75,22.35 31.75,20.95 29.84,19.05 v29.71,18.96
N$21  (via drill 0.36 pad 0.64)
  Top 0.203: U2.30 24.25,19.95 24.77,19.43 28.7,19.43 v28.89,19.64
  Bottom 0.178: 29.88,19.64 31.37,21.21
  Bottom 0.203: GPI.5 34.29,25.4 32.26,25.4 31.37,24.51 31.37,21.21 | v28.89,19.64 29.88,19.64
N$22  (via drill 0.36 pad 0.64)
  Top 0.203: U2.31 24.75,20.09 25.02,19.81 28.07,19.81 28.54,20.29 v29.61,20.33
  Bottom 0.203: GPI.6 34.29,27.94 32.26,27.94 30.99,26.67 30.99,21.46 29.84,20.32 v29.61,20.33
N$23  (via drill 0.36 pad 0.64)
  Top 0.203: U2.32 25.25,20.35 25.4,20.19 27.81,20.19 28.57,20.95 v28.84,20.97
  Bottom 0.178: 29.91,21.02 30.61,21.72
  Bottom 0.203: GPI.7 34.29,30.48 32.26,30.48 30.61,28.83 30.61,21.72 | v28.84,20.97 29.91,21.02
N$24  (via drill 0.36 pad 0.64)
  Top 0.203: U2.1 26.66,21.86 26.92,21.59 v29.59,21.68
  Bottom 0.203: GPI.8 34.29,33.02 32.26,33.02 30.23,30.99 30.23,21.97 29.84,21.68 v29.59,21.68
N$25  (via drill 0.36 pad 0.64)
  Top 0.203: U2.26 22.25,19.41 24.51,17.14 28.45,17.14 28.65,16.94 v28.7,16.94
  Bottom 0.203: GPI.1 34.29,15.24 31.75,15.24 29.57,16.93 v28.7,16.94
N$26
  Top 0.203: U2.5 30.86,24.38 31.37,23.88 31.37,20.7 GPO.2
N$27
  Top 0.203: U2.6 31,24.88 31.75,24.13 31.75,22.86 GPO.3
N$28
  Top 0.203: U2.7 31.77,25.38 GPO.4
N$29
  Top 0.203: U2.8 32.23,25.88 GPO.5
N$30
  Top 0.203: U2.9 25.25,27.91 25.4,28.07 31.88,28.07 GPO.6
N$31
  Top 0.203: U2.10 24.75,28.17 25.02,28.45 29.72,28.45 GPO.7
N$32
  Top 0.203: U2.11 24.25,28.31 24.77,28.83 29.46,28.83 31.75,31.11 31.75,33.02 GPO.8
N$33
  Top 0.203: U2.4 30.73,23.88 30.99,23.62 30.99,18.54 GPO.1
N$34
  Top 0.203: R5.1 TX.+
N$35
  Top 0.203: R6.1 RX.+
N$36
  Top 0.203: R16.1 37.85,39.43 L.+
N$37
  Top 0.203: R10.1 41.15,39.62 40.89,39.37 ON.+
N$38
  Top 0.203: R12.1 40.01,40.01 39.37,39.37 RST.+
N$39
  Top 0.203: U2.22 17.6,23.38 C3.1
PA0/D22
  Top 0.203: U4.78 62.36,33.61 62.36,34.54 64.01,36.2 66.42,36.2 78.49,48.26 J2.2
PA1/D23
  Top 0.203: U4.77 62.74,33.94 62.74,34.29 64.26,35.81 66.67,35.81 77.85,46.99 80.01,46.99 J2.35
PA2/D24
  Top 0.203: J2.3 77.22,45.72 66.93,35.43 64.52,35.43 63.37,34.29 63.37,34.01 U4.76
PA3/D25
  Top 0.203: U4.75 76.61,44.45 80.01,44.45 J2.34
PA4/D26
  Top 0.203: U4.74 76.04,43.18 J2.4
PA5/D27
  Top 0.203: U4.73 75.48,41.91 80.01,41.91 J2.33
PA6/D28
  Top 0.203: U4.72 74.92,40.64 J2.5
PA7/D29
  Top 0.203: U4.71 74.35,39.37 80.01,39.37 J2.32
PB0/SS/D53  (via drill 0.36 pad 0.64)
  Top 0.178: 67.69,20.49 68.44,21.12 | v23.5,33.4 U1.15
  Top 0.203: U4.19 61.98,17.09 61.98,17.4 60.99,18.29 v61.02,19.4 61.09,19.68 61.85,20.45 67.69,20.49 | 68.44,21.12 v69.12,21.22
  Bottom 0.203: v69.12,21.22 69.6,20.95 71.5,19.05 81.92,19.05 82.93,18.03 82.93,11.81 J2.20 | v61.02,19.4 61.09,23.11 57.91,26.29 53.72,26.29 51.57,24.22 50.17,24.26 49.53,24.77 49.53,26.04 48.9,26.67 46.99,26.67 36.96,36.7 26.8,36.7 24.45,34.24 23.62,33.4 v23.5,33.4
PB1/SCK/D52  (via drill 0.36 pad 0.41, 0.36 pad 0.64)
  Top 0.203: U4.20 62.36,16.77 62.36,17.65 61.72,18.29 v61.71,18.66 61.72,19.68 62.1,20.07 68.26,20.11 v68.58,20.38 | U1.14 24.14,35.07 v24.17,34.95
  Bottom 0.203: v68.58,20.38 69.56,20.39 73.41,16.51 81.92,16.51 82.55,15.88 82.55,12.06 81.92,11.43 80.01,11.43 J2.17 | v61.71,18.66 61.72,23.11 58.17,26.67 49.53,26.67 ICSP.2 46.35,27.94 37.21,37.08 25.92,37.08 24.13,35.29 v24.17,34.95
PB2/MOSI/D51  (via drill 0.36 pad 0.64)
  Top 0.178: v22.18,33.42 22.14,36.41
  Top 0.203: U4.21 62.77,16.43 62.74,17.85 62.41,18.16 v62.41,19.3 62.68,19.59 v69.22,19.66 | 22.14,36.41 U1.17
  Bottom 0.178: 23.5,35.26 25.65,37.47
  Bottom 0.203: J2.21 80.01,13.97 75.31,13.97 69.6,19.68 v69.22,19.66 | v62.41,19.3 62.48,22.99 57.53,27.94 ICSP.5 50.16,27.94 48.9,29.21 45.72,29.21 37.47,37.47 25.65,37.47 | v22.18,33.42 23.5,34.62 23.5,35.26
PB3/MISO/D50  (via drill 0.36 pad 0.51, 0.36 pad 0.64)
  Top 0.203: U4.22 63.23,16.31 v63.07,18.56 63.8,19.19 68.09,19.26 v68.4,18.9 | U1.16 22.83,35.05 v22.82,35.02
  Bottom 0.203: J2.16 75.95,12.7 69.6,18.98 v68.4,18.9 | v63.07,18.56 63.12,22.99 56.9,29.21 49.53,29.21 ICSP.1 45.09,30.48 37.72,37.85 25.39,37.85 22.86,35.32 v22.82,35.02
PB4/D10
  Top 0.203: U4.23 62.19,14.48 60.83,14.48 59.94,15.37 48.77,15.37 43.18,20.95 43.18,42.55 40.26,45.47 29.46,45.47 28.32,46.61 21.97,46.61 J3E.3
  Top 0.406: J3E.3 20.32,49.78 J3.3
PB5/D11
  Top 0.203: U4.24 62.52,14.1 60.58,14.1 59.69,14.99 48.51,14.99 42.8,20.7 42.8,42.29 40.01,45.09 29.21,45.09 28.07,46.23 19.81,46.23 J3E.4
  Top 0.406: J3E.4 17.78,49.78 J3.4
PB6/D12
  Top 0.203: U4.25 62.84,13.72 60.33,13.72 59.44,14.61 48.26,14.61 42.42,20.45 42.42,42.04 39.75,44.7 28.96,44.7 27.81,45.85 17.65,45.85 J3E.5
  Top 0.406: J3E.5 15.24,49.78 J3.5
PB7/D13
  Top 0.203: U4.26 65.56,14.86 64.77,14.86 63.25,13.34 60.07,13.34 59.18,14.22 48.01,14.22 42.04,20.19 42.04,41.78 39.5,44.32 39.12,44.32 | 39.12,44.32 38.61,44.32 | 38.61,44.32 28.7,44.32 27.56,45.47 17.4,45.47 15.88,46.99 13.97,46.99 J3E.6 | 38.86,44.07 38.86,44.32 | 38.86,44.07 R16.2 | 38.61,44.32 38.86,44.07 | 39.12,44.32 38.86,44.07
  Top 0.406: J3E.6 12.7,49.78 J3.6
PC0/D37
  Top 0.203: U4.53 76.92,29.21 80.01,29.21 J2.28
PC1/D36
  Top 0.203: U4.54 77.48,30.48 J2.9
PC2/D35
  Top 0.203: U4.55 78.05,31.75 80.01,31.75 J2.29
PC3/D34
  Top 0.203: U4.56 78.61,33.02 J2.8
PC4/D33
  Top 0.203: U4.57 77.47,32.59 77.47,33.66 78.11,34.29 80.01,34.29 J2.30
PC5/D32
  Top 0.203: U4.58 76.83,32.66 76.83,33.66 J2.7
PC6/D31
  Top 0.203: U4.59 76.2,32.73 76.2,34.92 78.11,36.83 80.01,36.83 J2.31
PC7/D30
  Top 0.203: U4.60 75.56,32.8 75.56,35.56 78.11,38.1 J2.6
PD0/SCL  (via drill 0.36 pad 0.64)
  Top 0.203: U4.43 70.36,22.08 70.36,24.77 v71.75,26.16
  Bottom 0.203: v71.75,26.16 71.12,26.8 INTERFACE.1
PD1/SDA  (via drill 0.36 pad 0.64)
  Top 0.203: U4.44 70.74,22.4 70.74,24.13 v71.75,25.15
  Bottom 0.203: v71.75,25.15 70.74,26.16 70.74,46.74 68.58,48.9 INTERFACE.2
PD2/RX1  (via drill 0.36 pad 0.64)
  Top 0.203: U4.45 71.12,22.73 71.12,23.5 v71.75,24.13
  Bottom 0.203: v71.75,24.13 70.36,25.53 70.36,46.48 INTERFACE.3
PD3/TX1  (via drill 0.36 pad 0.64)
  Top 0.203: U4.46 71.75,22.8 v71.83,23.04
  Bottom 0.203: v71.83,23.04 69.98,24.89 69.98,46.23 67.06,49.15 65.15,49.15 INTERFACE.4
PD7/D38
  Top 0.203: U4.50 75.06,23.5 76.83,23.5 77.47,24.13 82.55,24.13 82.93,24.51 82.93,26.29 82.55,26.67 80.39,26.67 79.12,27.94 J2.10
PE0/RX0/D0
  Top 0.203: U4.2 54.58,21.72 49.02,21.72 46.61,24.13 46.61,41.66 48.26,43.31 R8.2 J4E.1
  Bottom 0.406: J4E.1 J4.1
PE1/TX0/D1
  Top 0.203: J4E.2 R7.2 45.72,45.09 46.23,44.58 46.23,23.88 48.77,21.34 54.91,21.34 U4.3
  Bottom 0.406: J4E.2 J4.2
PE3/D5
  Top 0.203: J4E.6 36.83,49.53 43.81,49.53 44.45,48.9 44.45,45.72 45.85,44.32 45.85,23.62 48.51,20.95 55.94,20.95 U4.5
  Bottom 0.406: J4E.6 J4.6
PE4/D2
  Top 0.203: J4E.3 43.18,46.35 45.47,44.07 45.47,23.37 48.26,20.57 56.26,20.57 U4.6
  Bottom 0.406: J4E.3 J4.3
PE5/D3
  Top 0.203: J4E.4 45.09,43.81 45.09,23.11 48.01,20.19 56.59,20.19 U4.7
  Bottom 0.406: J4E.4 J4.4
PE6  (via drill 0.36 pad 0.64)
  Top 0.203: U4.8 56.79,19.68 49.4,19.68 v49.15,19.43 | U1.18 21.55,34.08 v21.27,34.11
  Bottom 0.203: 40.01,24.51 37.21,27.3 37.21,35.18 36.45,35.94 28.32,35.94 25.02,32.64 21.97,32.64 21.59,33.02 v21.27,34.11 | INT.MM INT.11 | v49.15,19.43 44.32,19.43 41.27,22.48
  Bottom 0.61: 40.01,24.51 INT.MM | INT.11 41.27,22.48
PF0/D54  (via drill 0.36 pad 0.64)
  Top 0.203: U4.97 56.77,25.77 v56.73,25.54
  Bottom 0.178: 55.93,24.71 v56.73,25.54
  Bottom 0.203: J5.1 37.21,4.19 41.02,4.19 47.88,11.05 54.48,11.05 56.26,12.83 56.26,23.88 55.91,24.14 55.93,24.71
PF1/D55  (via drill 0.36 pad 0.64)
  Top 0.178: v56.71,24.54 57.38,25.28
  Top 0.203: U4.96 57.41,25.83 57.38,25.28
  Bottom 0.203: J5.2 39.37,3.81 41.27,3.81 48.13,10.67 54.74,10.67 56.64,12.57 56.64,24.38 v56.71,24.54
PF2/D56  (via drill 0.36 pad 0.64)
  Top 0.203: U4.95 57.85,26.09 57.71,24.78 v57.68,24.65
  Bottom 0.178: 57.02,23.88 v57.68,24.65
  Bottom 0.203: J5.3 48.39,10.29 54.99,10.29 57.02,12.32 57.02,23.88
PF3/D57  (via drill 0.36 pad 0.64)
  Top 0.178: v57.72,23.67 58.35,24.29
  Top 0.203: U4.94 58.29,26.37 58.35,24.29
  Bottom 0.203: J5.4 45.59,4.95 53.21,4.95 57.4,9.14 57.4,23.37 v57.72,23.67
PF4/D58  (via drill 0.36 pad 0.64)
  Top 0.203: U4.93 58.67,26.69 58.81,23.88 v58.86,23.85
  Bottom 0.178: 57.78,22.84 v58.86,23.85
  Bottom 0.203: J5.5 47.75,4.57 53.47,4.57 57.78,8.89 57.78,22.84
PF5/D59  (via drill 0.36 pad 0.64)
  Top 0.178: v58.63,22.73 59.57,23.58
  Top 0.203: U4.92 59.18,26.89 59.57,23.58
  Bottom 0.203: J5.6 49.91,4.19 53.72,4.19 58.17,8.64 58.17,22.35 v58.63,22.73
PF6/D60  (via drill 0.36 pad 0.64)
  Top 0.203: U4.91 59.59,27.18 60.06,23.25 v59.74,22.84
  Bottom 0.178: 58.59,21.8 v59.74,22.84
  Bottom 0.203: J5.7 52.07,3.81 53.98,3.81 58.55,8.38 58.59,21.8
PF7/D61  (via drill 0.36 pad 0.64)
  Top 0.178: v59.59,21.82 60.42,22.48
  Top 0.203: U4.90 59.98,27.48 60.26,25.47 60.74,23.22 60.42,22.48
  Bottom 0.203: J5.8 58.93,8.13 59.05,21.33 v59.59,21.82
PG0/D41
  Top 0.203: U4.51 75.8,26.67 79.63,26.67 80.9,25.4 J2.26
PG1/D40
  Top 0.203: U4.52 73.66,25.24 73.66,24.77 74.3,24.13 76.2,24.13 77.47,25.4 J2.11
PG2/D39  (via drill 0.36 pad 0.64)
  Top 0.203: U4.70 69.98,34.29 v72.39,34.29
  Bottom 0.203: v72.39,34.29 77.47,29.21 80.01,29.21 J2.27
PG5/D4
  Top 0.203: J4.5 39.37,52.07 49.4,52.07 50.29,51.18 50.29,44.7 46.99,41.4 46.99,24.38 49.28,22.1 54.25,22.1 U4.1
  Bottom 0.406: J4.5 J4E.5
PH0/RXD2  (via drill 0.36 pad 0.64)
  Top 0.203: U4.12 61.25,21.29 67.04,21.29 v68.05,22.19
  Bottom 0.203: INTERFACE.5 62.99,48.77 66.8,48.77 69.6,45.97 69.6,23.88 v68.05,22.19
PH1/TXD2  (via drill 0.36 pad 0.64)
  Top 0.203: U4.13 61.52,20.9 67.5,20.88 68.83,21.94 68.83,22.7 v68.07,23.37
  Bottom 0.203: INTERFACE.6 60.83,48.39 66.55,48.39 69.22,45.72 69.22,24.51 v68.07,23.37
PH3/D6
  Top 0.203: U4.15 58.95,16.89 50.67,16.89 44.7,22.86 44.7,43.56 41.27,46.99 34.29,46.99 J4E.7
  Bottom 0.406: J4E.7 J4.7
PH4/D7  (via drill 0.36 pad 0.64)
  Top 0.203: U4.16 59.27,16.51 50.42,16.51 45.09,21.84 v44.7,21.84 44.32,22.23 44.32,43.31 41.02,46.61 32.13,46.61 J4E.8
  Bottom 0.203: 38.73,27.05 41.02,24.77 42.55,24.77 44.7,22.61 v44.7,21.84
  Bottom 0.406: J4E.8 J4.8
  Bottom 0.61: 38.73,27.05 HOST_RST.00
PH5/D8  (via drill 0.36 pad 0.64)
  Top 0.203: U4.17 59.6,16.13 49.66,16.13 v49.28,16.51 49.28,17.02 47.12,19.18 46.23,19.18 43.94,21.46 43.94,43.05 40.77,46.23 29.97,46.23 27.94,48.26 J3E.1
  Top 0.406: J3E.1 25.4,49.78 J3.1
  Bottom 0.203: v49.28,16.51 40.26,16.51 38.73,18.03
  Bottom 0.61: 38.73,18.03 GPX.00
PH6/D9  (via drill 0.36 pad 0.64)
  Top 0.203: U4.18 59.92,15.75 49.02,15.75 46.74,18.03 v46.74,18.41 46.35,18.41 43.56,21.21 43.56,42.8 40.51,45.85 29.72,45.85 28.57,46.99 24.13,46.99 J3E.2
  Top 0.406: J3E.2 22.86,49.78 J3.2
  Bottom 0.203: v46.74,18.41 44.7,18.41 41.78,21.34 39.88,21.34 38.73,22.48
  Bottom 0.61: 38.73,22.48 INT.00
PJ0/RXD3  (via drill 0.36 pad 0.64)
  Top 0.203: U4.63 68.83,28.19 68.83,25.91 v68.07,25.15
  Bottom 0.203: INTERFACE.7 58.67,48.01 66.29,48.01 68.83,45.47 68.83,25.91 v68.07,25.15
PJ1/TXD3  (via drill 0.36 pad 0.64)
  Top 0.203: U4.64 68.45,28.52 68.45,26.54 v68.07,26.16
  Bottom 0.203: INTERFACE.8 56.52,47.62 66.04,47.62 68.45,45.21 68.45,26.54 v68.07,26.16
PJ2  (via drill 0.36 pad 0.64)
  Top 0.178: 24.85,33.43 U1.13
  Top 0.203: v24.77,33.4 24.85,33.43 | U4.65 60,20.59 59,20.59 55.88,23.75 54.99,23.75 53.72,22.48 50.93,22.48 v50.44,22.82
  Bottom 0.203: 40.01,28.83 37.59,31.24 37.59,35.43 36.7,36.32 27.69,36.32 v24.77,33.4 | HOST_RST.MM HOST_RST.11 | 41.27,27.05 45.47,22.86 v50.44,22.82
  Bottom 0.61: 40.01,28.83 HOST_RST.MM | HOST_RST.11 41.27,27.05
PJ3  (via drill 0.36 pad 0.64)
  Top 0.203: U1.20 20.25,34.11 v20.49,33.47 | U4.66 59.75,20.99 59.18,21.08 56.13,24.13 54.74,24.13 53.47,22.86 51.69,22.88 v51.44,23.17
  Bottom 0.203: 40.01,20.07 36.83,23.24 36.83,34.92 36.2,35.56 28.57,35.56 25.27,32.26 21.72,32.26 20.95,33.02 v20.49,33.47 | GPX.MM GPX.11 | 41.27,18.16 42.04,17.4 48.26,17.4 51.44,20.57 v51.44,23.17
  Bottom 0.61: 40.01,20.07 GPX.MM | GPX.11 41.27,18.16
PL0/D49
  Top 0.203: U4.35 69.89,16.89 74.17,16.89 77.09,13.97 80.01,13.97 J2.22
PL1/D48
  Top 0.203: U4.36 70.21,17.27 74.42,17.27 76.45,15.24 J2.15
PL2/D47
  Top 0.203: U4.37 70.54,17.65 74.68,17.65 75.82,16.51 80.01,16.51 J2.23
PL3/D46
  Top 0.203: U4.38 70.87,18.03 74.93,18.03 75.18,17.78 J2.14
PL4/D45
  Top 0.203: U4.39 71.19,18.41 74.93,18.41 75.56,19.05 80.01,19.05 J2.24
PL5/D44
  Top 0.203: U4.40 71.52,18.8 74.68,18.8 76.2,20.32 J2.13
PL6/D43
  Top 0.203: U4.41 71.84,19.18 74.42,19.18 76.83,21.59 80.01,21.59 J2.25
PL7/D42
  Top 0.203: J2.12 77.47,22.86 74.17,19.56 72.17,19.56 U4.42
RESET  (via drill 0.36 pad 0.64)
  Top 0.203: U4.30 67.94,15.3 67.94,14.73 66.93,13.72 66.93,13.34 R11.1 67.18,12.95 59.82,12.95 58.93,13.84 52.58,13.84 v52.2,13.46 | v39.37,33.27 39.37,35.37 | 39.37,35.37 39.37,35.75 | 39.37,35.75 RST.- | 39.18,35.56 37.08,35.56 | 37.08,35.56 36.58,35.56 | 39.37,35.75 39.18,35.56 | 39.37,35.37 39.18,35.56 | C22.1 36.83,39.56 36.83,35.81 | 36.83,35.81 36.83,35.56 | 36.58,35.56 36.83,35.81 | 37.08,35.56 36.83,35.81 | 36.58,35.56 30.23,35.56 28.96,34.29 D1.-
  Top 0.305: J1.6 16.48,1.25 15.72,1.25 15.47,0.99 S1.4 14.73,1.47 10.9,1.47 10.41,0.99 S1.3
  Bottom 0.203: J1.6 19.81,4.57 40.77,4.57 47.62,11.43 50.16,11.43 v52.2,13.46 52.2,23.37 51.8,23.83 49.89,23.84 ICSP.3 47.62,25.4 39.75,33.27 v39.37,33.27
RI
  Top 0.203: U3.6 14.95,42.33 15.62,41.66 19.05,41.66 19.68,42.29 26.92,42.29 28.83,40.39 28.83,38.48 29.46,37.85 31.37,37.85 31.75,38.23 31.75,40.64 UART.5
RST_3V3
  Top 0.203: U2.12 23.75,28.44 24.8,29.49 U1.8
RTS
  Top 0.203: U3.3 16.89,42.67 17.53,42.04 18.8,42.04 19.43,42.67 27.18,42.67 UART.1
SCK_3V3
  Top 0.203: U2.13 23.25,28.58 24.14,29.48 U1.7
SPI_OE
  Top 0.203: R15.2 28.38,32.96 D1.+ 28.83,31.81 27.35,30.34 U1.10
SS_3V3
  Top 0.203: U1.6 23.5,29.46 22.75,28.71 U2.14
USB_5V  (via drill 0.36 pad 0.64, 0.36 pad 0.81, 0.38 pad 0.81)
  Top 0.305: R6.2 R5.2 v26.16,40.13 | U3.20 12.99,39.08 U5V.T
  Top 0.406: COMPUTER.1 6.32,44.48 C10.2
  Top 0.61: C10.2 6.92,44.51 10.79,40.64 U5V.T
  Top 0.813: v31.62,12.06 Q1.3
  Bottom 0.305: 13.34,35.56 12.7,35.56 | 12.7,36.2 13.34,35.56 | 12.7,34.92 13.34,35.56 | 13.34,35.56 18.16,35.56 22.73,40.13 v26.16,40.13
  Bottom 0.813: v31.62,12.06 30.99,12.7 24,12.7 17.59,19.11 17.59,29.65 12.7,34.54 12.7,34.92 12.7,36.2 12.7,39.37 U5V.T
  other vias: 11.43,40.64
VCC  (via drill 0.36 pad 0.64, 0.38 pad 1.02)
  Top 0.203: C15.2 68.77,14.54 R11.2 | R12.2 R10.2
  Top 0.254: v67.11,17.87 67.06,16.89 U4.31 68.77,15.18 C15.2 | C12.2 71.94,29.89 U4.61 69.72,27.67 69.72,25.78 68.2,24.26 v67.17,24.29 | U4.100 54.89,25.53 53.85,25.53 C11.2 53.34,25.65 v53.34,24.64 | U4.10 57.25,18.73 C14.2 54.93,18.73 v54.74,18.92 | U4.80 61.15,33.41 C13.2 60.33,34.28 60.33,34.29 | 59.44,34.29 60.33,34.29 | 60.33,35.18 60.33,34.29 | 60.33,34.29 59.82,34.8
  Top 0.305: U3.4 16.25,42.3 v16.25,42.33 | C1.1 v19.18,37.85 20.57,37.85 20.89,37.52 U1.19 | v40.01,42.29 R12.2
  Top 0.406: C11.2 52.32,27.05 52.32,28.96 ICSP.6
  Top 0.61: v53.98,30.48 C16.+
  Top 0.813: J2.36 J2.1 65.41,37.47 62.61,37.47 60.33,35.18 59.44,34.29 C16.+ | 3V3_VCC_5V.COM1 3.94,32.89 JMP1.2
  Bottom 0.254: v53.34,24.64 54.74,23.24 v54.74,18.92
  Bottom 0.305: 16.26,43.31 v16.25,42.33 19.18,39.37 v19.18,37.85 | 15.75,43.81 16.26,43.31 | 16.76,43.81 16.26,43.31 | 40.01,43.18 40.01,43.94 | 40.01,43.18 v40.01,42.29 | 39.37,43.81 40.01,43.18 | 40.64,43.81 40.01,43.18
  Bottom 0.61: v67.11,17.87 v67.17,24.29 67.18,28.41 64.65,30.65 v53.98,30.48 ICSP.6
  Bottom 0.813: 3V3_VCC_5V.COM1 3V3_VCC_5V.COM2 3.94,38.23 9.53,43.81 15.75,43.81 16.76,43.81 39.37,43.81 40.64,43.81 42.55,43.81 46.35,40.01 46.35,35.56 50.8,31.11 ICSP.6
VIN  (via drill 0.38 pad 1.02)
  Top 0.254: R17.1 C24.2
  Top 0.305: J1.1 35.24,7.3 R17.1
  Top 0.61: 19.94,15.24 18.29,15.24 D5.- | 19.94,15.24 U6.5 | 19.94,15.24 R1.1
  Top 0.813: v15.49,10.79 C26.+ D5.-
  Bottom 0.813: J1.1 28.78,1.12 14.3,1.12 12.7,2.54 12.7,7.99 v15.49,10.79

## Text on the board
tPlace: VCC | VCC | 22 | 23 | 14 | 15 | 16 | 17 | 18 | 19 | 20 | 21 | GND | 9 | 8 | 7 | 6 | 5 | 4 | 3 | 2 | 13 | 12 | 11 | 10 | 24 | 25 | AREF | PWM | DTR | RI | DCD | 1 | 0 | TX3 | RX3 | TX2 | RX2 | TX1 | RX1 | SDA | SCL | 26 | 27 | TX | RX | 28 | 29 | COMMUNICATION | RTS | DSR | CTS | 30 | 31 | 32 | 33 | 7 | 7 | 1 | 34 | 35 | 6 | 6 | 36 | 37 | 5 | 5 | 38 | 39 | 4 | 4 | GPOUT | GPIN | 40 | 41 | 3 | 3 | 42 | 43 | 2 | 2 | 44 | 45 | 1 | 1 | 46 | 47 | 0 | 0 | 48 | 49 | 50 | 51 | 52 | 53 | ANALOG IN | GND | RST | 3V3 | 5V | GND | GND | VIN | 0 | 1 | 2 | 3 | 4 | 5 | 6 | 7 | 8 | 9 | 10 | 11 | 12 | 13 | 14 | 15
bPlace: PH4 | PJ2 | PH6 | PE6 | PH5 | PJ3 | - | + | www.nullspacelabs.com | based on work shared by Google and SeeedStudios
tValues: Micro USB